# Altium PCB ENCBoard_rectangle.PcbDoc
Units mm, origin at the board's own origin, x right, y up, seen from the top; angles counter-clockwise.
Board outline 48 x 48 mm, 2 copper layers (Top Layer, Bottom Layer), stack 1.569 mm thick; 39 components, 33 nets, 226 pads, 78 vias.
Unrouted connection lines stored in the file: 19.
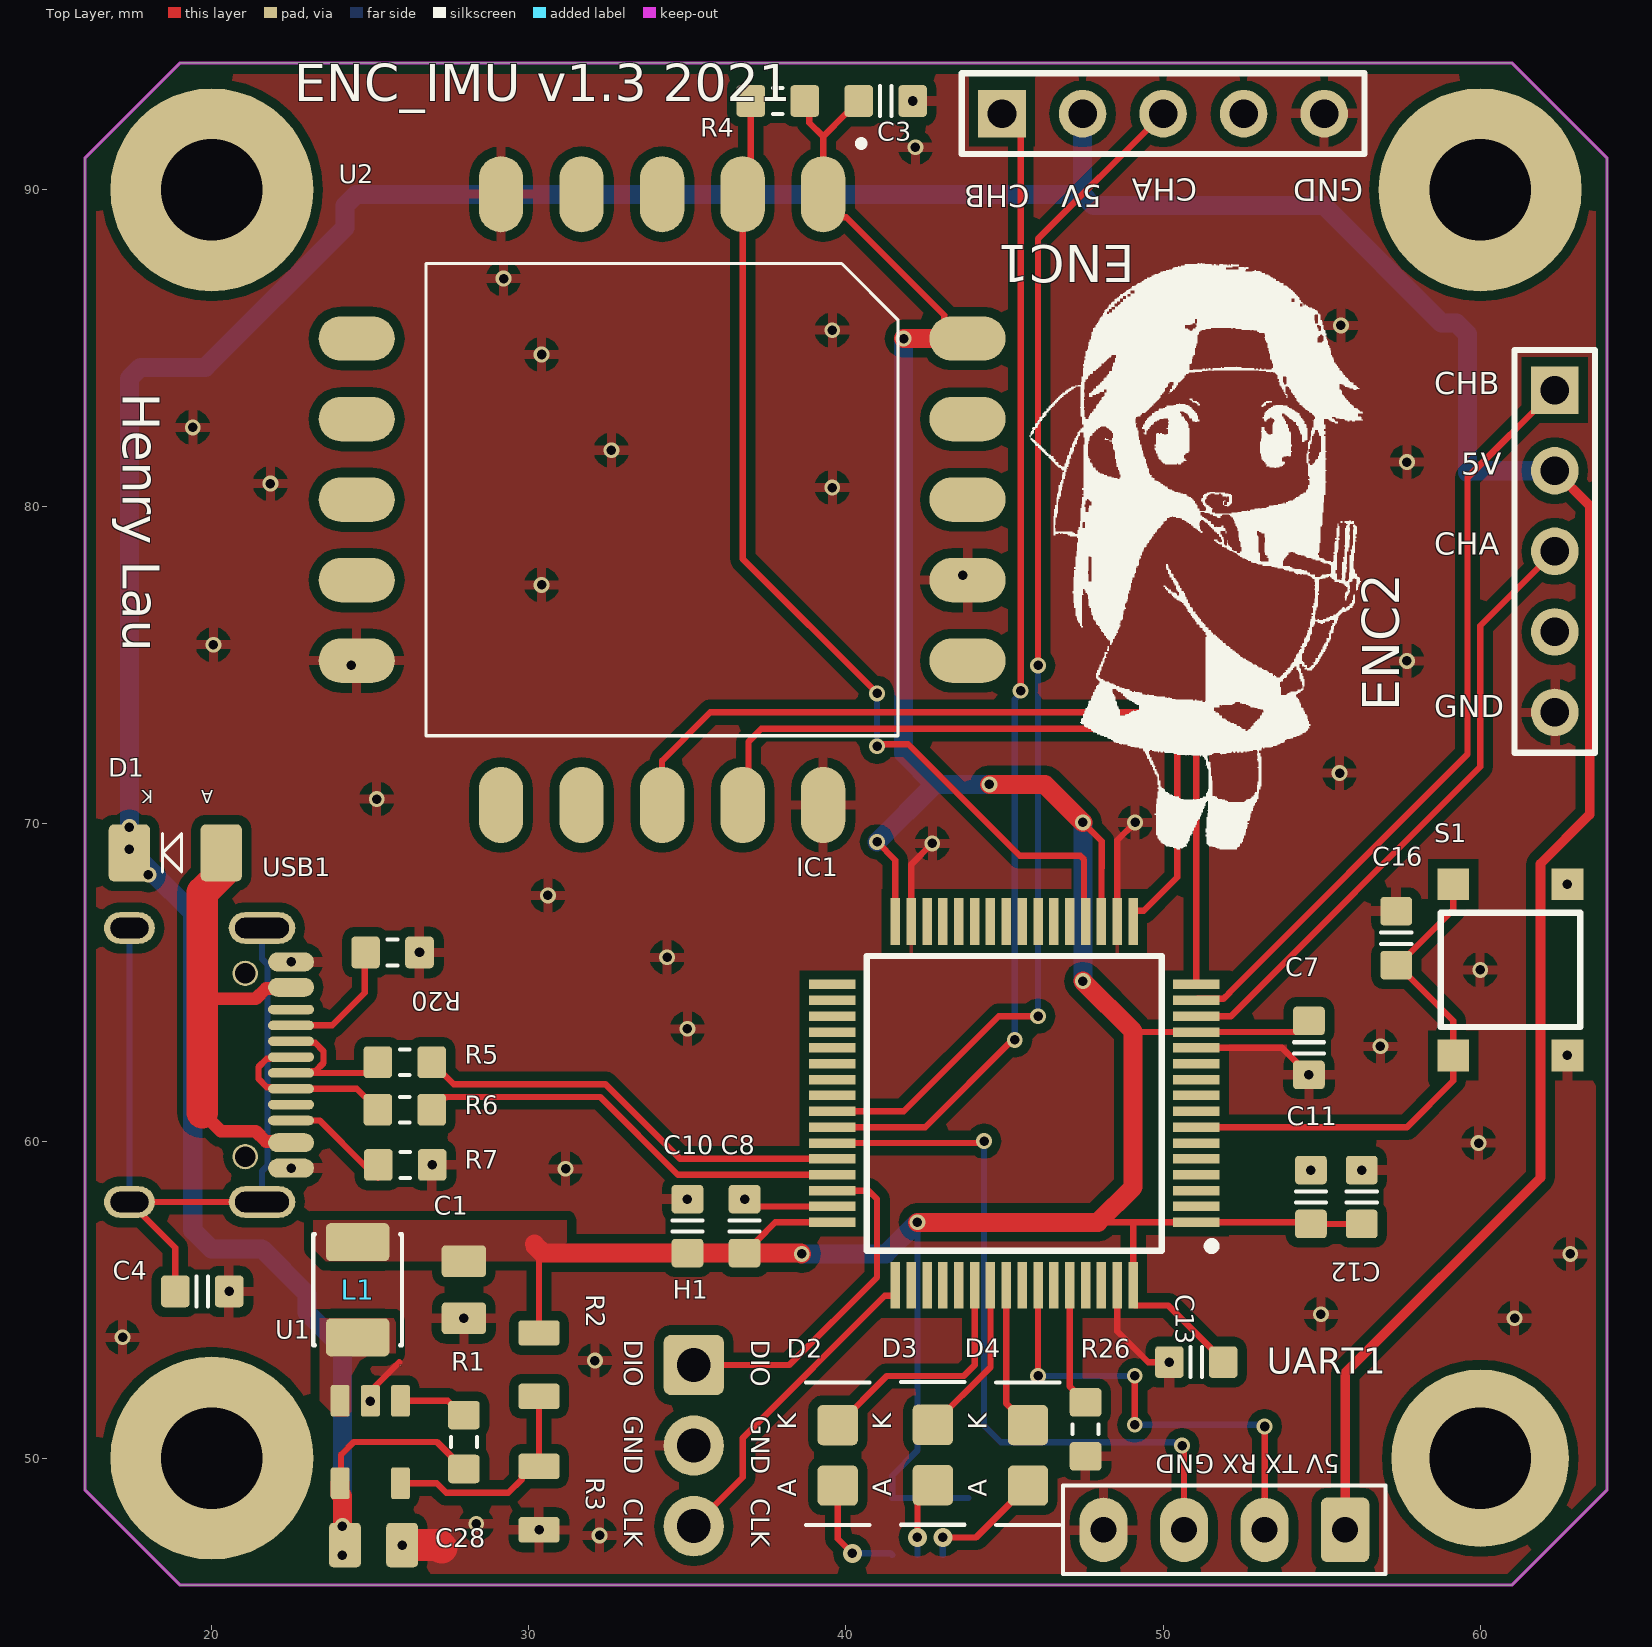
[diagram p0: Top Layer view]
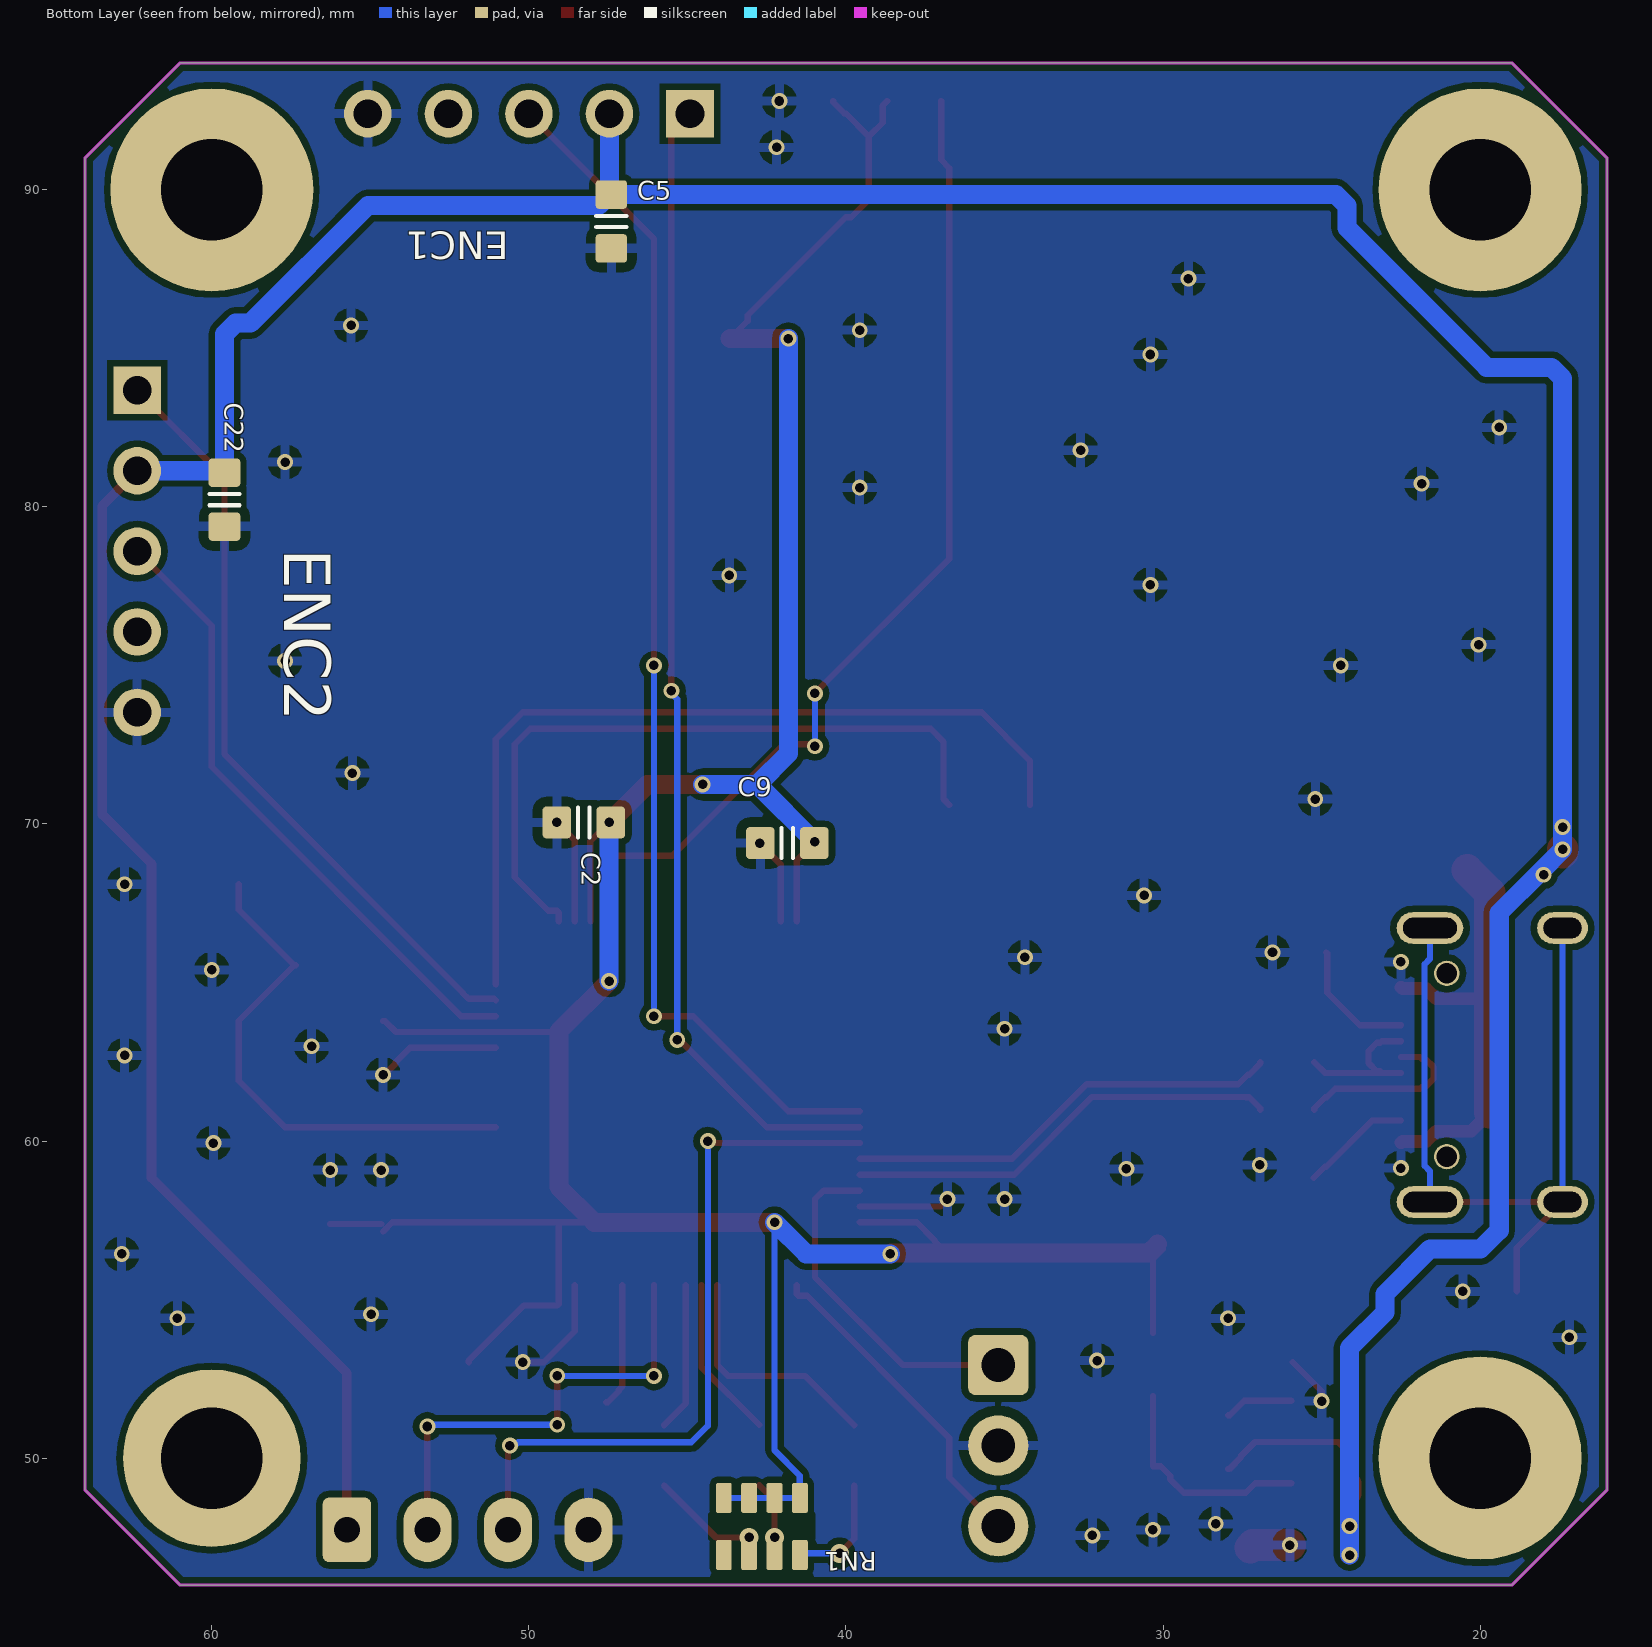
[diagram p1: Bottom Layer view, seen from below]
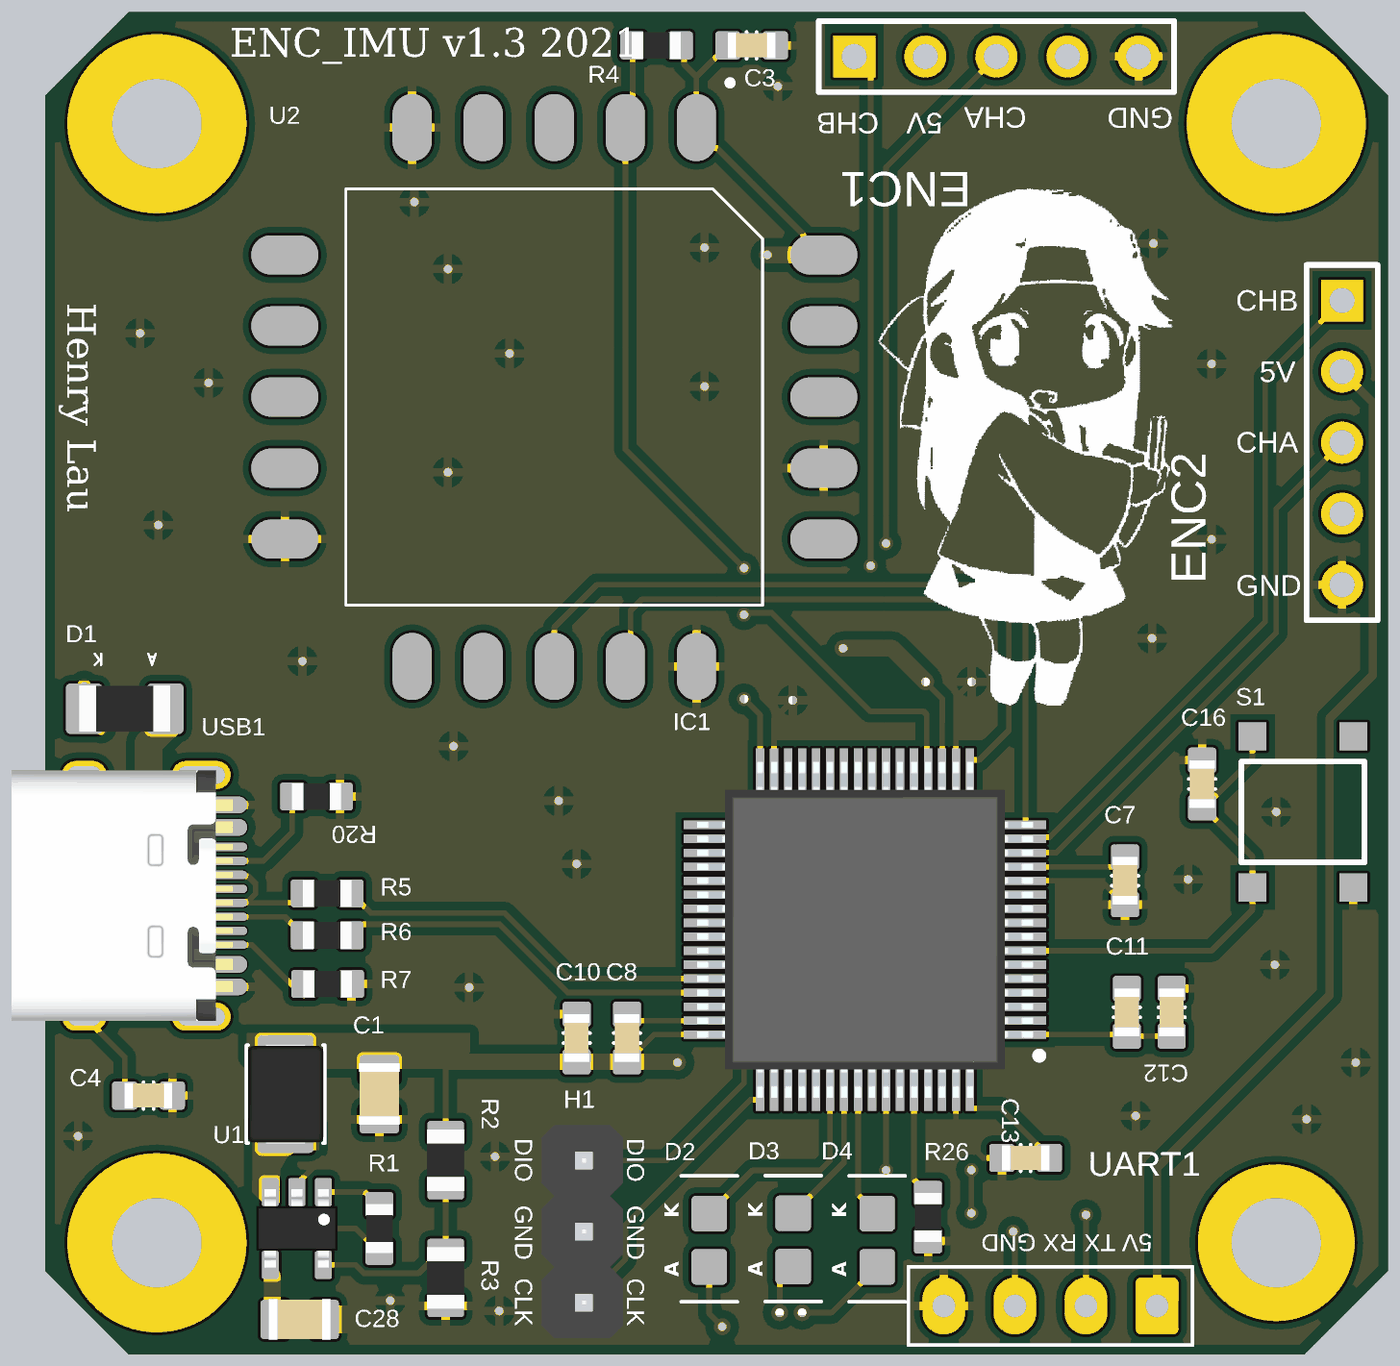
[diagram p2: 3D render of the assembled board from above, using the file's embedded part models]
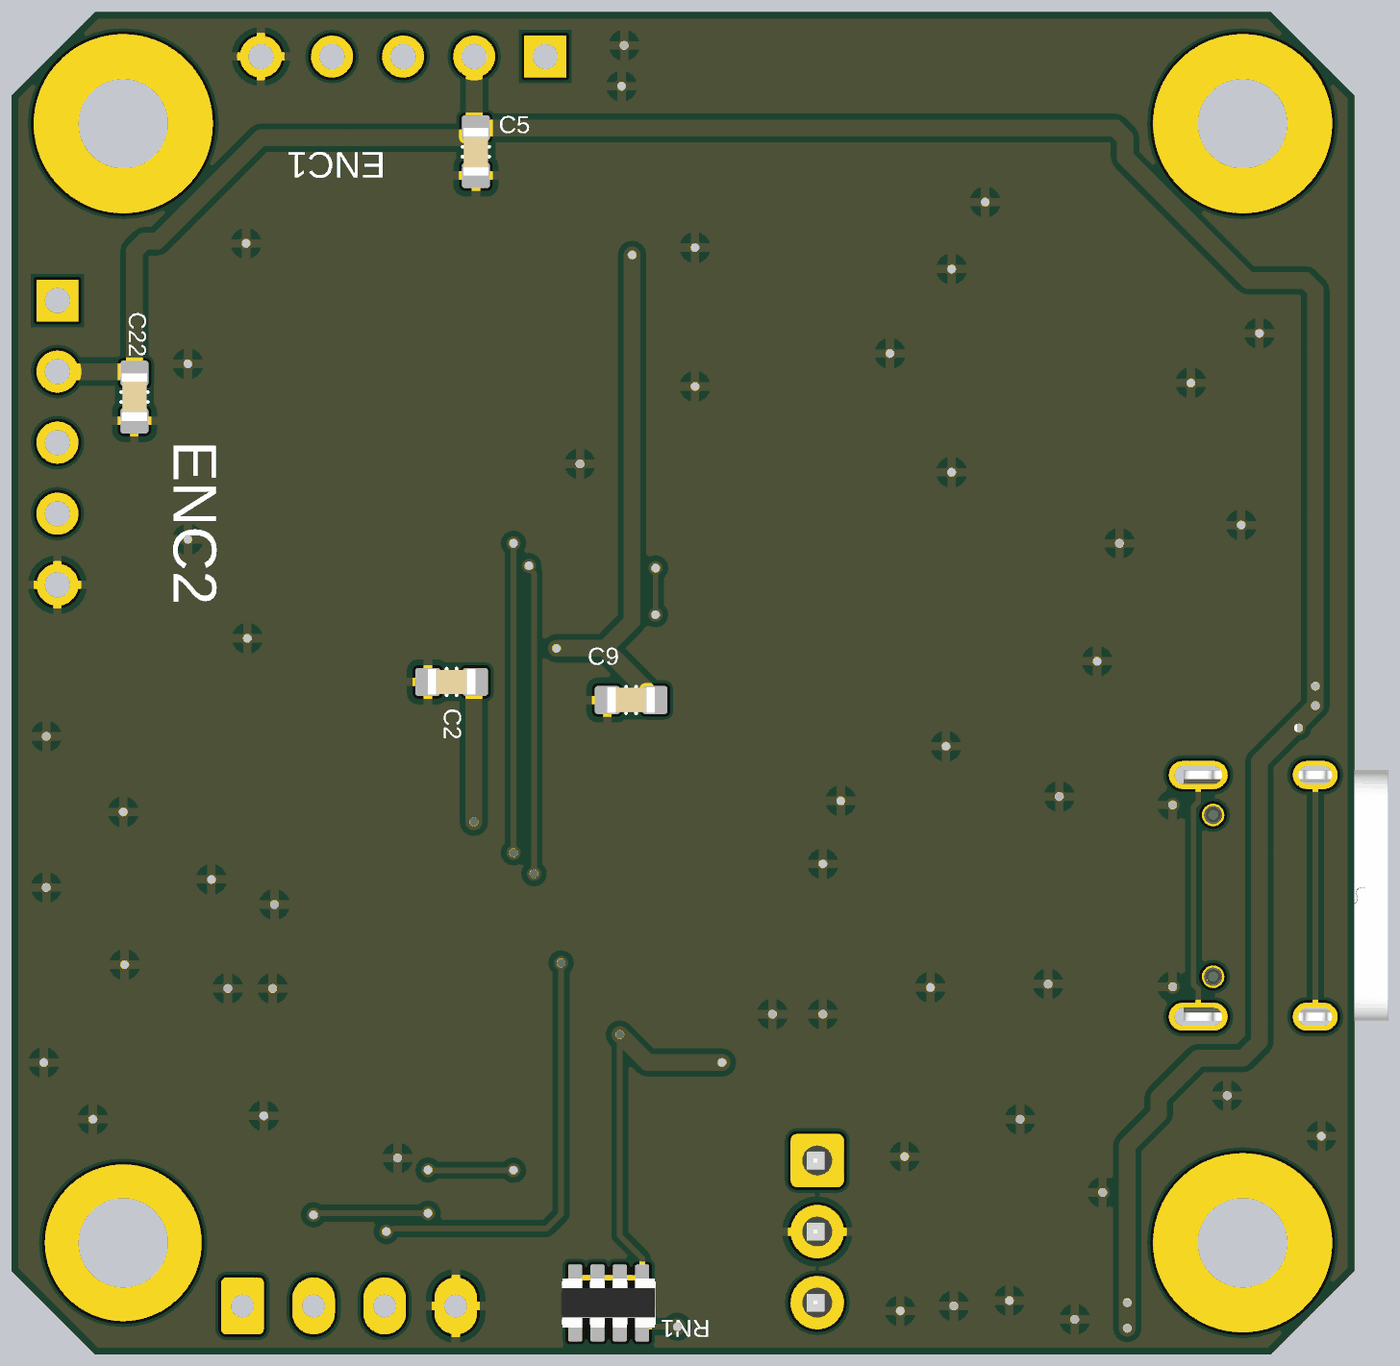
[diagram p3: 3D render of the assembled board from below, using the file's embedded part models]

## Layer stack, top to bottom
Top Solder: solder mask 0.0254, SM-001, Dk 4
Top Layer: signal copper 0.035
Dielectric 1: core 1.4986, Core-043, Dk 4.3
Bottom Layer: signal copper 0.035
Bottom Solder: solder mask 0.0254, SM-001, Dk 4

## Board outline
19,94 61,94 64,91 64,49 61,46 19,46 16,49 16,91

## Design rules (kind name [scope] priority, off if disabled: settings)
Clearance "GND plane" [OnLayer('Signal Layer 2', 'Signal Layer 1') OR InNamedPolygon('TOP_GND')] p1: gap=0.3 ignorepadtopadclearanceinfootprint=FALSE
Clearance [All] p2: gap=0.2 ignorepadtopadclearanceinfootprint=FALSE
HoleSize [All] p1: absolutevalues=TRUE maxlimit=100 minlimit=0.05 maxpercent=80.000 minpercent=20.000
MinimumSolderMaskSliver [All] p1: minsoldermaskwidth=0.09
PolygonConnect J1 [InComponent('J1')] p1: thpad.connectstyle=Direct thpad.reliefconductorwidth=0.254 thpad.reliefentries=4 thpad.polygonreliefangle="90 Angle" thpad.airgapwidth=0.254 smdpad.connectstyle=Relief smdpad.reliefconductorwidth=0.254 smdpad.reliefentries=4 smdpad.polygonreliefangle="90 Angle" smdpad.airgapwidth=0.254 via.connectstyle=Relief via.reliefconductorwidth=0.254 via.reliefentries=4 via.polygonreliefangle="90 Angle" via.airgapwidth=0.254
PolygonConnect "Ground Plane (signal)" [InNet('GND')] p2: connectstyle=Relief reliefconductorwidth=0.3 reliefentries=4 polygonreliefangle="90 Angle" airgapwidth=0.3
PolygonConnect [All] p3: connectstyle=Direct reliefconductorwidth=0.254 reliefentries=4 polygonreliefangle="90 Angle" airgapwidth=0.254
RoutingVias [All] p1: holewidth=0.3 width=0.5 viastyle="Through Hole" minholewidth=0.3 minwidth=0.5 maxholewidth=6 maxwidth=6.3
SilkToSilkClearance [All] p1: silktosilkclearance=0.09
SilkToSolderMaskClearance [IsPad] p1: minsilkscreentomaskgap=0.09 clearancetoexposedcopper=TRUE
SolderMaskExpansion [All] p1: expansion=0.102 istentingtop=FALSE
Width [All] p1: maxlimit=10 minlimit=0.2 preferedwidth=0.2
26 further rules are at their usual default settings.

## Classes and differential pairs
component class U_IMU: C2 C3 R4 U2
component class U_STM32F401R: C4 C7 C8 C9 C10 C11 C12 C13 C16 D1 D2 D3 D4 H1 IC1 R5 R6 R7 R20 R26 RN1 S1 UART1 USB1
component class U_EncoderHeader: C5 C22 ENC1 ENC2
component class U_5V_to_3V3: C1 C28 L1 R1 R2 R3 U1

## Components (designator, comment, footprint, x,y, rotation, side; value= is the part's Value field where it differs from the comment)
C1 "Cap" CAPC2012X135N 27.95,55.313 r90 top value=10u
C2 "Cap" CAPC1608X90N 48.268,70.048 r180 bottom value=0.1u
C3 "Cap" CAPC1608X90N 41.25,92.8 r180 top value=0.1u
C4 "Cap" CAPC1608X90N 19.7,55.26 r180 top value=10p
C5 "Cap" CAPC1608X90N 47.4,89 r90 bottom value=1u
C7 "Cap" CAPC1608X90N 54.597,62.939 r90 top value=1u
C8 "Cap" CAPC1608X90N 36.8,57.32 r270 top value=1u
C9 "Cap" CAPC1608X90N 41.85,69.4 r180 bottom value=1u
C10 "Cap" CAPC1608X90N 35,57.32 r270 top value=1u
C11 "Cap" CAPC1608X90N 54.661,58.237 r270 top value=1u
C12 "Cap" CAPC1608X90N 56.264,58.237 r270 top value=1u
C13 "Cap" CAPC1608X90N 51.044,53.031 r0 top value=0.1u
C16 "Cap" CAPC1608X90N 57.351,66.4 r270 top value=0.1u
C22 "Cap" CAPC1608X90N 59.6,80.23 r90 bottom value=1u
C28 "Cap" CAPC2012X135N 25.101,47.261 r180 top value=10u
D1 "diode" DIODE_3216_70N 18.85,69.09 r180 top
D2 "LED_Green_GullWing" LED-0805-A 39.738,50.091 r90 top
D3 "LED_Green_GullWing" LED-0805-A 42.738,50.102 r90 top
D4 "LED_Green_GullWing" LED-0805-A 45.738,50.091 r90 top
ENC1 "Header 5" HDR1X5 44.92,92.4 r0 top (schematic designator P1)
ENC2 "Header 5" HDR1X5 62.351,83.68 r270 top (schematic designator P2)
H1 "ST-Link" ST-Link 35.2,52.94 r270 top
IC1 "STM32F072RBT7" QFP50P1200X1200X160-64N 45.306,61.189 r180 top
L1 "inductor" INDM3225X240N 24.6,55.313 r90 top value=2u2
R1 "Res1" RESC1608X55N 27.95,50.51 r90 top value=10K
R2 "Res1" RESC2012X70N 30.32,52.95 r90 top value=100K
R3 "Res1" RESC2012X70N 30.32,48.743 r270 top value=22K
R4 "Res1" RESC1608X55N 37.85,92.8 r0 top value=10K
R5 "Res1" RESC1608X55N 26.085,62.489 r0 top value=22R
R6 "Res1" RESC1608X55N 26.085,60.989 r0 top value=22R
R7 "Res1" RESC1608X55N 26.1,59.25 r180 top value=5K1
R20 "Res1" RESC1608X55N 25.7,65.95 r180 top value=5K1
R26 "Res1" RESC1608X55N 47.556,50.91 r90 top value=10K
RN1 "resistor network" RESCAXS50P160X320X70-8N 42.654,47.848 r270 bottom value=1K
S1 "SW_THT_PB_4.3mm" TACT_SWT-SMD-4.4 63.151,67.6 r270 top
U1 "TLV62569" SOT23-5 25,50.51 r270 top
U2 "LPMS-NAV2" LPMS-NAV2 39.28,89.46 r270 top
UART1 "Programmer" HDR1X4_2.54MMP 55.74,47.743 r180 top
USB1 "USB type C connector" TYPE-C-31-M-12 22.5,62.4 r270 top

## Footprints (in the part's own frame and the unit in brackets; to place one, negate y for a bottom-side part, rotate by r counter-clockwise, add the part's x,y. Pads: shape width x height; smd on the part's side, far side on the other; paste and mask are expansions set on the pad)
CAPC1608X90N [mm] "Chip Capacitor, Body 1.6x0.8mm, EIA 0603, IPC Medium Density"
  round 0.254 on Mech15: 0(0,0)
  rrect25% 0.9x1 smd: 1(-0.85,0) 2(0.85,0)
  Top Layer pour cut-out: -0.6,0.5 -0.4,0.7 0.4,0.7 0.6,0.5 0.6,-0.5 0.4,-0.7 -0.4,-0.7 -0.6,-0.5
  silkscreen extent -0.18,-0.48 0.18,0.48, body extent -0.85,-0.45 0.85,0.45, height 0.89
CAPC2012X135N [mm]
  round 0.254 on Mech15: 0(0,0)
  rrect25% 1x1.4 smd: 1(-0.9,0) 2(0.9,0)
  body extent -1.1,-0.72 1.1,0.73, height 1.34
DIODE_3216_70N [mm]
  round 0.508 on Mech15: 0(0,0)
  rrect25% 1.3x1.8 smd mask+0.102: A(-1.45,0)
  rrect25% 1.3x1.8 smd: K(1.45,0)
  silkscreen extent -0.2,-0.6 0.4,0.6, body extent -1.62,-0.82 1.63,0.83, height 0.69
HDR1X4_2.54MMP [mil] "Connector; Header; 4 Position 0.100\" pitch"
  rrect25% 60x80 hole 32: 1(0,0)
  oval 60x80 hole 32: 2(100,0) 3(200,0) 4(300,0)
  silkscreen extent -50,-55 350,55
HDR1X5 [mm] "Connector; Header; 5 Position"
  rect 1.5x1.5 hole 0.9: 1(0,0)
  round 1.5 hole 0.9: 2(2.54,0) 3(5.08,0) 4(7.62,0) 5(10.16,0)
  silkscreen extent -1.27,-1.27 11.43,1.27
INDM3225X240N [mm] "Molded Inductor, 2-Leads, Body 3.2x2.5mm, IPC Medium Density"
  round 0.508 on Mech15: 0(0,0)
  rrect25% 1.2x2 smd: 1(-1.5,0) 2(1.5,0)
  silkscreen extent -1.75,-1.4 1.75,1.4, body extent -1.79,-1.35 1.79,1.35, height 2.4
LED-0805-A [mil]
  round 20 on Mech15: 0(0,0)
  rrect25% 50x50 smd: A(-37.5,0) K(37.5,0)
  Top Layer pour cut-out: -15,30 15,30 15,-30 -15,-30
  silkscreen extent -87,-39 91,39, body extent -39,-25 39,25, height 31
LPMS-NAV2 [mm]
  oval 2.4x1.4 smd: 1(-0.4,0) 2(-0.4,-2.54) 3(-0.4,-5.08) 4(-0.4,-7.62) 5(-0.4,-10.16) 11(18.86,-10.16) 12(18.86,-7.62) 13(18.86,-5.08) 14(18.86,-2.54) 15(18.86,0)
  oval 1.4x2.4 smd: 6(4.15,-14.71) 7(6.69,-14.71) 8(9.23,-14.71) 9(11.77,-14.71) 10(14.31,-14.71) 16(14.31,4.55) 17(11.77,4.55) 18(9.23,4.55) 19(6.69,4.55) 20(4.15,4.55)
  silkscreen extent -2.1,-12.52 16.67,2.36, body extent -0.8,-15.2 19.52,5.12, height 3.7
QFP50P1200X1200X160-64N [mm]
  rect 1.475x0.3 smd: 1(-5.738,3.75) 2(-5.738,3.25) 3(-5.738,2.75) 4(-5.738,2.25) 5(-5.738,1.75) 6(-5.738,1.25) 7(-5.738,0.75) 8(-5.738,0.25) 9(-5.738,-0.25) 10(-5.738,-0.75) 11(-5.738,-1.25) 12(-5.738,-1.75) 13(-5.738,-2.25) 14(-5.738,-2.75) 15(-5.738,-3.25) 16(-5.738,-3.75) 33(5.738,-3.75) 34(5.738,-3.25) 35(5.738,-2.75) 36(5.738,-2.25) 37(5.738,-1.75) 38(5.738,-1.25) 39(5.738,-0.75) 40(5.738,-0.25) 41(5.738,0.25) 42(5.738,0.75) 43(5.738,1.25) 44(5.738,1.75) 45(5.738,2.25) 46(5.738,2.75) 47(5.738,3.25) 48(5.738,3.75)
  rect 0.3x1.475 smd: 17(-3.75,-5.738) 18(-3.25,-5.738) 19(-2.75,-5.738) 20(-2.25,-5.738) 21(-1.75,-5.738) 22(-1.25,-5.738) 23(-0.75,-5.738) 24(-0.25,-5.738) 25(0.25,-5.738) 26(0.75,-5.738) 27(1.25,-5.738) 28(1.75,-5.738) 29(2.25,-5.738) 30(2.75,-5.738) 31(3.25,-5.738) 32(3.75,-5.738) 49(3.75,5.738) 50(3.25,5.738) 51(2.75,5.738) 52(2.25,5.738) 53(1.75,5.738) 54(1.25,5.738) 55(0.75,5.738) 56(0.25,5.738) 57(-0.25,5.738) 58(-0.75,5.738) 59(-1.25,5.738) 60(-1.75,5.738) 61(-2.25,5.738) 62(-2.75,5.738) 63(-3.25,5.738) 64(-3.75,5.738)
  silkscreen extent -6.35,-4.65 4.65,4.65, body extent -6,-6 6,6, height 1.6
RESC1608X55N [mm] "Chip Resistor, Body 1.6x0.8mm, EIA 0603, IPC Medium Density"
  round 0.254 on Mech15: 0(0,0)
  rrect25% 0.9x1 smd: 1(-0.85,0) 2(0.85,0)
  Top Layer pour cut-out: -0.6,0.5 -0.4,0.7 0.4,0.7 0.6,0.5 0.6,-0.5 0.4,-0.7 -0.4,-0.7 -0.6,-0.5
  silkscreen extent -0.15,-0.41 0.15,0.41, body extent -0.87,-0.47 0.88,0.48, height 0.54
RESC2012X70N [mm]
  rrect25% 0.8x1.3 smd: 1(-1,0) 2(1,0)
  body extent -1.1,-0.67 1.1,0.68, height 0.69
RESCAXS50P160X320X70-8N [mm] "Resistor Pack, Body 1.6x3.2mm, 4x0603, IPC Medium Density"
  round 0.254 on Mech15: 0(0,0)
  rrect25% 0.95x0.5 smd: 1(-0.9,1.2) 2(-0.9,0.4) 3(-0.9,-0.4) 4(-0.9,-1.2) 5(0.9,-1.2) 6(0.9,-0.4) 7(0.9,0.4) 8(0.9,1.2)
  Top Layer pour cut-out: -0.4,1.7 0.4,1.7 0.4,-1.7 -0.4,-1.7
  body extent -0.87,-1.68 0.88,1.67, height 0.7
SOT23-5 [mm]
  rrect25% 1x0.6 smd: 1(-1.3,0.95) 2(-1.3,0) 3(-1.3,-0.95) 4(1.3,-0.95) 5(1.3,0.95)
  body extent -1.4,-1.45 1.4,1.45, height 1.44
ST-Link [mil] "Connector; Header; 3 Position"
  rrect25% 75x75 hole 42: 1(0,0)
  round 75 hole 42: 2(100,0) 3(200,0)
  body extent -50,-57 250,57, height 335
TACT_SWT-SMD-4.4 [mm]
  rect 1x1 smd mask+0.102: 1(-0.5,-4) 1(4.9,-4) 2(-0.5,-0.4) 2(4.9,-0.4)
  silkscreen extent 0.4,-4.4 4,0
TYPE-C-31-M-12 [mm] "type C connector"
  oval 0.6x1.45 smd mask+0.05: A1(-3.25,0) A4(-2.45,0) B1(3.25,0) B4(2.45,0)
  oval 0.3x1.45 smd mask+0.05: A5(-1.25,0) A6(-0.25,0) A7(0.25,0) A8(1.25,0) B5(1.75,0) B6(0.75,0) B7(-0.75,0) B8(-1.75,0)
  round 0.8 hole 0.65: NA(-2.89,-1.445) NA(2.89,-1.445)
  oval 1x2.1 hole 0.65 slot 1.7 at 90 deg: SH(-4.32,-0.915) SH(4.32,-0.915)
  oval 1x1.6 hole 0.65 slot 1.2 at 90 deg: SH(-4.32,-5.095) SH(4.32,-5.095)
  body extent -4.47,-7.7 4.48,0.2, height 3.23

## Part data
C1 C2 C3 C4 C5 C7 C8 C9 C10 C11 C12 C13 C16 C22 C28: "Capacitor", LatestRevisionDate=17-Jul-2002, LatestRevisionNote="Re-released for DXP Platform.", PackageDescription="Radial Cap, Thru-Hole; 2 Leads; 0.3 in Pin Spacing", PackageReference=RAD-0.3, Published=8-Jun-2000, Publisher="Altium Limited"
D1: library part SD1206S040S2R0, "40V 2A", ComponentLink1Description=mouser, ComponentLink1URL=https://www.mouser.hk/ProductDetail/AVX/SD1206S040S2R0?qs=jCA%252BPfw4LHbfEJl0sZ31oA%3D%3D
D2 D3 D4: "LED Gull-wing SMD High-intensity Green 450mcd 574nm", Color=Green, Manufacturer 1=Ligitek, Manufacturer Part Number 1=L8UG9033/TR1, Package / Case="4.6mm Gull-Wing", Ratings="450 mcd; 574 nm", Material=AlGaInP, SCDType=source
ENC1 ENC2: "Header, 5-Pin", LatestRevisionDate=17-Jul-2002, LatestRevisionNote="Re-released for DXP Platform.", Publisher="Altium Limited"
H1: "ST-Link header with silkscreen"
IC1: "Integrated Circuit", Manufacturer_Name=STMicroelectronics, Mouser Part Number=511-STM32F072RBT7, Arrow Part Number=STM32F072RBT7, Arrow Price/Stock=https://www.arrow.com/en/products/stm32f072rbt7/stmicroelectronics, Datasheet Link=https://componentsearchengine.com/Datasheets/1/STM32F072RBT7.pdf, Height=1.6mm, Manufacturer_Part_Number=STM32F072RBT7, Mouser Price/Stock=https://www.mouser.co.uk/ProductDetail/STMicroelectronics/STM32F072RBT7?qs=U58vgkJzipSwHgVHrxMqQQ%3D%3D
L1: library part INDC, "IHLP SMD 4040", link=http://www.mouser.hk/ProductDetail/Panasonic/ETQ-P5M4R7YFC/?qs=sGAEpiMZZMsg%252by3WlYCkUx1BJssUTVH58rrEHsPkNus%3d
R1 R2 R3 R4 R5 R6 R7 R20 R26: "Resistor", LatestRevisionDate=17-Jul-2002, LatestRevisionNote="Re-released for DXP Platform.", PackageDescription="Axial Device, Thru-Hole; 2 Leads; 0.3 in Pin Spacing", PackageReference=AXIAL-0.3, Published=8-Jun-2000, Publisher="Altium Limited"
RN1: library part RES_NET
S1: "Switch, tact, 4.3mm stem", Manufacturer 1=Bond-Tact, Manufacturer Part Number 1=TS-1143-WP-300, Package / Case="6.5x6.5mm; 4.3mm stem", Function=Speed, Material="Brass/Nylon/Ag plating", SCDType=spec
U1: "2-A High Efficiency Synchronous Buck Converter in SOT Package", Manufacturer=TI, Iout(max)=2A, Vin=2.5-5.5V
UART1: library part Header4P, "Header 4-pin"
USB1: library part USB_Type_C, ComponentLink1Description=Datasheet, ComponentLink1URL=https://lcsc.com/product-detail/USB-Type-C_Korean-Hroparts-Elec-TYPE-C-31-M-12_C165948.html
U2: ComponentLink1Description=datasheet, ComponentLink1URL=https://www.lp-research.com/wp-content/uploads/2017/11/LPMS-NAV2Manual20171025.pdf, ComponentLink2Description="official website", ComponentLink2URL=https://lp-research.com/lpms-nav2/

## Free pads (board coordinates)
  round 5.6 hole 3.2: 3(60,50)
  round 6.4 hole 3.2: 10(20,50) 11(20,90) 12(60,90)

## Via types
v1: diameter 0.5, hole 0.3, Top Layer to Bottom Layer, tented both sides, 75 vias
v2: diameter 0.6, hole 0.3, Top Layer to Bottom Layer, tented both sides, 3 vias

## Nets (pads, with @x,y where several pads share a name; then routed paths per layer and width w, separated by ;. In a path a pad name is that pad's centre, name@x,y a point inside that pad or via, vN(x,y) a via of type N, cw(c..) or ccw(c..) an arc to the next point about the centre after c; other vN are vias at no path point)
3V3: C1.2 C2.2 C3.2 C7.2 C8.2 C9.2 C10.2 C11.2 C12.2 C13.2 IC1.1 IC1.13 IC1.19 IC1.32 IC1.48 IC1.64 L1.2 R2.2 R4.2 RN1.1 RN1.2 RN1.3 RN1.4 U2.1 U2.20 | length 111.3
  Top Layer w0.2: 30.015,56.598 30.32,56.293 R2.2 ; C8.2@36.843,56.47 37.192,56.819 37.192,56.863 37.769,57.439 IC1.48 ; R4.2 38.843,92.657 38.843,92.117 39.28,91.68 ; C3.2 40.4,92.757 40.051,92.408 40.008,92.408 39.28,91.68 ; v1(40.98,69.437) 41.556,68.861 IC1.32 ; U2.20 43.655,85.31 43.1,85.864 43.1,86.04 40.01,89.13 39.834,89.13 39.28,89.685 U2.1 39.28,91.68 ; v1(47.472,70.048) 48.068,69.453 48.068,68.616 48.056,68.604 IC1.19 ; 47.945,57.439 49.056,57.439 ; 49.056,63.462 49.078,63.439 IC1.13 54.191,63.439 54.541,63.789 C7.2 ; C13.2 51.894,53.081 50.16,54.814 49.106,54.814 49.056,54.864 IC1.64 49.056,57.439 ; C11.2@54.597,57.151 54.309,57.439 IC1.1 49.056,57.439 ; C11.2 C12.2
  Top Layer w0.6: 30.17,56.753 30.452,56.47 C10.2 C8.2 36.843,56.47 38.575,56.47 v1(38.604,56.442) ; v1(41.817,85.31) U2.20@43.655,85.31 ; v1(42.254,57.439) 47.945,57.439 49.056,58.55 49.056,63.462 v1(47.472,65.046) ; v1(44.52,71.247) 46.273,71.247 v1(47.472,70.048)
  Bottom Layer w0.2: v1(42.254,57.439) 42.254,50.25 41.454,49.45 RN1.1 RN1.2 RN1.3 RN1.4
  Bottom Layer w0.6: v1(38.604,56.442) 41.256,56.442 v1(42.254,57.439) ; v1(40.98,69.437) 42.79,71.247 ; v1(41.817,85.31) 41.817,72.22 42.79,71.247 ; v1(44.52,71.247) 42.79,71.247 ; v1(47.472,65.046) v1(47.472,70.048)
5V: C5.2 C22.2 C28.2 D1.K ENC1.2 ENC2.2 R1.1 U1.4 UART1.1 | length 142.2
  Top Layer w0.2: U1.4 24.077,49.237 24.077,50.11 24.477,50.51 27.1,50.51 27.558,50.053 27.558,50.009 27.907,49.66 R1.1
  Top Layer w0.3: UART1.1 55.74,52.684 61.901,58.845 61.901,68.745 63.451,70.295 63.451,80.04 ENC2.2
  Top Layer w0.6: U1.4 24.05,48.878 24.121,48.808 v1(24.121,46.948)
  Top Layer w1: D1.K v1(17.4,69.2)
  Bottom Layer w0.6: v1(24.121,46.948) v1(24.121,47.86) 24.121,53.479 23,54.6 23,55.185 21.585,56.6 19.986,56.6 19.4,57.186 19.4,67.2 18.1,68.5 v1(17.4,69.2) v1(17.4,69.9) 17.4,84.049 17.751,84.4 19.8,84.4 24.2,88.8 24.2,89.499 24.551,89.85 C5.2 ; ENC1.2 47.46,89.91 C5.2 ; ENC2.2 59.66,81.14 C22.2 59.6,85.449 59.249,85.8 58.78,85.8 55.08,89.5 47.8,89.5 47.45,89.85 C5.2
  other v1: 18,68.4
BOOT0: IC1.60 R26.2 | length 3.9
  Top Layer w0.2: IC1.60 47.056,52.26 47.164,52.152 47.164,52.109 47.513,51.76 R26.2
ENC1_CHA: ENC1.3 IC1.41 | length 37.8
  Top Layer w0.2: IC1.41 41.817,60.939 44.817,63.939 v1(46.056,63.939) ; v1(46.056,75) 46.056,88.456 ENC1.3
  Bottom Layer w0.2: v1(46.056,63.939) v1(46.056,75)
ENC1_CHB: ENC1.1 IC1.42 | length 36.4
  Top Layer w0.2: IC1.42 42.495,60.439 45.245,63.189 v1(45.323,63.189) ; ENC1.1 45.506,91.814 v1(45.506,74.2)
  Bottom Layer w0.2: v1(45.323,63.189) 45.323,73.936 45.506,74.119 v1(45.506,74.2)
ENC2_CHA: ENC2.3 IC1.14 | length 20
  Top Layer w0.2: IC1.14 52.139,63.939 60,71.8 60,76.249 ENC2.3
ENC2_CHB: ENC2.1 IC1.15 | length 24.4
  Top Layer w0.2: IC1.15 51.094,64.489 51.906,64.489 52.081,64.665 52.081,64.681 59.6,72.2 59.6,80.929 ENC2.1
GND: C1.1 C2.1 C3.1 C4.1 C5.1 C7.1 C8.1 C9.1 C10.1 C11.1 C12.1 C13.1 C16.1 C22.1 C28.1 ENC1.5 ENC2.5 H1.2 IC1.12 IC1.18 IC1.31 IC1.47 IC1.63 R3.2 R7.1 R20.1 R26.1 S1.2 U1.2 U2.5 U2.10 U2.15 U2.17 UART1.4 USB1.A1 USB1.B1 | length 19.3
  Top Layer w0.2: v1(25,51.8) 25,52.108 25.917,53.025 ; v1(36.8,58.17) 37.031,57.939 IC1.47 ; IC1.31 42.056,68.724 v1(42.721,69.39) ; IC1.63 48.556,54.007 49.532,53.031 v1(50.194,53.031) ; IC1.18 48.556,69.487 v1(49.118,70.048) ; IC1.12 53.747,62.939 54.205,62.482 54.205,62.438 54.554,62.089 v1(54.597,62.089)
  Top Layer w1: v1(26.001,47.261) 27.162,47.261 27.25,47.173
  other v1: 32.231,47.565 30.32,47.743 28.338,47.933 32.081,53.081 17.185,53.813 27.95,54.413 61.085,54.414 54.977,54.539 20.55,55.26 62.84,56.442 35,58.17 54.661,59.087 56.264,59.087 31.157,59.127 22.5,59.15 26.95,59.25 59.951,59.939 62.751,62.7 56.851,62.989 35,63.543 60,65.4 22.5,65.65 34.358,65.797 26.55,65.95 30.6,67.746 62.751,68.1 25.2,70.787 55.564,71.604 24.4,75 57.69,75.143 20.051,75.654 30.4,77.54 43.68,77.84 39.568,80.61 21.848,80.734 57.69,81.414 32.6,81.786 19.4,82.509 30.4,84.806 39.568,85.571 55.61,85.721 29.2,87.2 42.191,91.341 42.1,92.8
LED1: D2.K IC1.54 | length 7.6
  Top Layer w0.2: D2.K 41.288,52.593 43.711,52.593 44.056,52.938 IC1.54
LED2: D3.K IC1.55 | length 5.2
  Top Layer w0.2: D3.K 44.556,52.872 IC1.55
LED3: D4.K IC1.56 | length 4.7
  Top Layer w0.2: IC1.56 45.056,51.726 D4.K
N\R\S\T\: IC1.20 R4.1 U2.2 | length 32.2
  Top Layer w0.2: R4.1 37,90.945 36.74,90.685 U2.2 36.74,78.359 v1(40.98,74.119) ; v1(40.98,72.45) 41.061,72.45 41.128,72.517 41.967,72.517 45.483,69 47.389,69 47.506,68.883 47.506,66.977 IC1.20
  Bottom Layer w0.2: v1(40.98,72.45) v1(40.98,74.119)
NetC4_2: C4.2 USB1.SH | length 25
  Top Layer w0.2: USB1.SH@17.405,58.08 USB1.SH@17.488,58.08 ; C4.2 18.85,56.635 17.858,57.627 17.858,57.71 USB1.SH@17.488,58.08 ; USB1.SH@21.585,58.08 USB1.SH@17.488,58.08
  Bottom Layer w0.2: USB1.SH@17.405,58.08 USB1.SH@17.405,66.72 ; USB1.SH@21.585,58.08 21.585,59.05 21.755,59.22 21.755,65.58 21.585,65.75 USB1.SH@21.585,66.72
NetD1_A: D1.A USB1.A4 USB1.B4 | length 14.3
  Top Layer w0.4: 19.7,60.9 20.29,60.31 21.386,60.31 21.708,59.988 22.461,59.988 USB1.B4 ; 19.7,64.9 20.11,64.49 21.386,64.49 21.708,64.812 22.461,64.812 USB1.A4
  Top Layer w1: 19.7,60.9 19.7,64.49 19.7,64.9 19.7,67.837 D1.A@20.409,68.546
NetD2_A: D2.A RN1.8 | length 3.6
  Top Layer w0.2: D2.A 39.738,47.462 v2(40.2,47)
  Bottom Layer w0.2: v2(40.2,47) 41.402,47 RN1.8
NetD3_A: D3.A RN1.7 | length 2.4
  Top Layer w0.2: v2(42.254,47.5) 42.254,48.665 D3.A
  Bottom Layer w0.2: RN1.7 v2(42.254,47.5)
NetD4_A: D4.A RN1.6 | length 3.9
  Top Layer w0.2: v2(43.054,47.5) 44.099,47.5 D4.A
  Bottom Layer w0.2: RN1.6 v2(43.054,47.5)
NetL1_1: L1.1 U1.3
NetR1_2: R1.2 U1.1 | length 2.2
  Top Layer w0.2: U1.1 27.443,51.81 27.893,51.36 R1.2
NetR2_1: R2.1 R3.1 U1.5 | length 7.1
  Top Layer w0.2: U1.5 27.092,49.21 27.392,48.91 29.353,48.91 29.77,49.327 29.77,49.443 30.07,49.743 R3.1 R2.1
NetR5_1: R5.1 USB1.A7 USB1.B7 | length 5
  Top Layer w0.2: USB1.A7 USB1.A7@23.102,62.15 ; USB1.B7 23.102,63.15 23.152,63.1 23.261,63.1 23.525,62.836 23.525,62.464 23.261,62.2 23.152,62.2 USB1.A7@23.102,62.15 ; R5.1 24.895,62.15 USB1.A7@23.102,62.15
NetR6_1: R6.1 USB1.A6 USB1.B6 | length 5.7
  Top Layer w0.2: USB1.A6 21.898,62.65 21.848,62.6 21.738,62.6 21.475,62.336 21.475,61.964 21.738,61.7 21.848,61.7 21.898,61.65 USB1.B6 24.574,61.65 24.842,61.382 24.886,61.382 25.235,61.033 R6.1
NetR7_2: R7.2 USB1.B5 | length 3.5
  Top Layer w0.2: USB1.B5 23.4,60.65 24.858,59.192 24.901,59.192 R7.2@25.25,58.843
NetR20_2: R20.2 USB1.A5 | length 4
  Top Layer w0.2: USB1.A5 23.799,63.65 24.828,64.679 24.828,65.928 R20.2
NRST: C16.2 IC1.7 S1.1 | length 16.4
  Top Layer w0.2: IC1.7 57.69,60.439 59.151,61.9 59.151,63.8 C16.2@57.401,65.55 ; C16.2 C16.2@57.394,65.55 ; S1.1@59.151,68.1 59.151,67.3 C16.2@57.401,65.55 ; C16.2@57.394,65.55 C16.2@57.401,65.55 ; C16.2@57.394,65.55 C16.2@57.401,65.55
SWCLK: H1.3 IC1.49 | length 10.4
  Top Layer w0.2: H1.3 36.74,49.4 36.74,50.636 41.223,55.119 41.506,55.119 41.556,55.169 IC1.49
SWDIO: H1.1 IC1.46 | length 10.9
  Top Layer w0.2: H1.1 38.213,52.94 40.98,55.707 40.98,58.17 40.711,58.439 IC1.46
UART1_RX: IC1.43 UART1.3 | length 23
  Top Layer w0.2: IC1.43 44.212,59.939 44.273,60 v1(44.354,60) ; v1(50.6,50.4) 50.66,50.34 UART1.3
  Bottom Layer w0.2: v1(44.354,60) 44.354,51.027 44.877,50.504 50.333,50.504 50.38,50.457 50.543,50.457 v1(50.6,50.4)
UART1_TX: IC1.58 UART1.2 | length 14.8
  Top Layer w0.2: v1(46.056,52.593) IC1.58 ; v1(49.106,51.054) v1(49.106,52.6) ; UART1.2 v1(53.2,51)
  Bottom Layer w0.2: v1(46.056,52.593) 49.099,52.593 v1(49.106,52.6) ; v1(49.106,51.054) 53.146,51.054 v1(53.2,51)
UART2_RX: IC1.17 U2.14 | length 22.3
  Top Layer w0.2: U2.14 36.927,70.787 36.927,72.597 37.33,73 49.96,73 50.444,72.517 50.444,68.315 49.389,67.26 49.106,67.26 49.056,67.21 IC1.17
UART2_TX: IC1.16 U2.13 | length 27
  Top Layer w0.2: U2.13 34.2,72 35.72,73.52 50.194,73.52 51.044,72.67 IC1.16
USB_DN: IC1.44 R5.2 | length 13.9
  Top Layer w0.2: R5.2 26.935,62.446 27.284,62.097 27.327,62.097 27.635,61.789 32.416,61.789 34.766,59.439 IC1.44
USB_DP: IC1.45 R6.2 | length 13.8
  Top Layer w0.2: R6.2 26.935,61.033 27.284,61.382 27.394,61.382 27.402,61.389 32.25,61.389 34.7,58.939 IC1.45
pads on no net: C1.0 C2.0 C3.0 C4.0 C5.0 C7.0 C8.0 C9.0 C10.0 C11.0 C12.0 C13.0 C16.0 C22.0 C28.0 D1.0 D2.0 D3.0 D4.0 ENC1.4 ENC2.4 IC1.2 IC1.3 IC1.4 IC1.5 IC1.6 IC1.8 IC1.9 IC1.10 IC1.11 IC1.21 IC1.22 IC1.23 IC1.24 IC1.25 IC1.26 IC1.27 IC1.28 IC1.29 IC1.30 IC1.33 IC1.34 IC1.35 IC1.36 IC1.37 IC1.38 IC1.39 IC1.40 IC1.50 IC1.51 IC1.52 IC1.53 IC1.57 IC1.59 IC1.61 IC1.62 L1.0 R1.0 R4.0 R5.0 R6.0 R7.0 R20.0 R26.0 RN1.0 RN1.5 U2.3 U2.4 U2.6 U2.7 U2.8 U2.9 U2.11 U2.12 U2.16 U2.18 U2.19 USB1.A8 USB1.B8 USB1.NA

## Polygon pours and split planes (outlines as drawn)
GND on Top Layer "TOP_GND" (solid, pour order 34): 16,49 16,91 19,94 61,94 64,91 64,49 61,46 19,46
NetL1_1 on Top Layer "NETL1_1_L01_P018" (solid, pour order 18): 24.4,52.31 24.402,52.593 24.672,53.081 25.057,53.307 25.8,53.307 25.8,54.31 25.8,54.413 23.41,54.413 23.403,51.811 23.904,51.31 24.251,51.31 24.4,51.46
3V3 on Top Layer "3V3_L01_P016" (solid, pour order 16): 31.199,56.812 30.6,56.213 23.6,56.213 23.2,56.613 23.2,57.502 31.199,57.502
GND on Bottom Layer "BOT_GND" (solid, pour order 28): 61,94 19,94 16,91 16,49 19,46 61,46 64,49 64,91

## Keep-outs
Keep-Out Layer:
  lines w0.1: 19,46 16,49 16,91 19,94 61,94 64,91 64,49 ; 19,46 19,46 ; 19,46 61,46 64,49 ; 64,49 64,49

## Silkscreen, mask and mechanical layers (free items; w line width, h text height)
Top Overlay:
  drawing of 7 lines, arcs and shapes, not listed
  text "ENC_IMU v1.3 2021" at 22.6,92.4 h2
  text "CHA" at 51.075,90.587 h1.2 r180
  text "GND" at 56.309,90.573 h1.2 r180
  text "CHB" at 45.8,90.387 h1.2 r180
  text "5V" at 48.071,90.382 h1.2 r180
  text "Henry Lau" at 16.8,83.6 h2 r270
  text "CHB" at 58.556,83.317 h1.2
  text "5V" at 59.4,80.771 h1.2
  text "CHA" at 58.556,78.249 h1.2
  text "GND" at 58.556,73.133 h1.2
  text "5V TX RX GND" at 55.564,50.31 h1 r180
Bottom Overlay:
  text "ENC1" at 50.628,88.983 h1.5 r180
  text "ENC2" at 58.2,78.674 h2.5 r90

## Text inside footprints (layer, text, board x,y; h text height)
D1: Top Overlay "K" at 18.156,71.059 h0.4 r180; Top Overlay "A" at 20.051,71.059 h0.4 r180
D2: Top Overlay "K" at 38.638,50.891 h1 r90; Top Overlay "A" at 38.638,48.791 h1 r90
D3: Top Overlay "K" at 41.638,50.902 h1 r90; Top Overlay "A" at 41.638,48.802 h1 r90
D4: Top Overlay "A" at 44.638,48.791 h1 r90; Top Overlay "K" at 44.638,50.891 h1 r90
H1: Top Overlay "CLK" at 36.8,48.74 h1 r270; Top Overlay "DIO" at 36.8,53.74 h1 r270; Top Overlay "GND" at 36.8,51.34 h1 r270; Top Overlay "GND" at 32.8,51.34 h1 r270; Top Overlay "DIO" at 32.8,53.74 h1 r270; Top Overlay "CLK" at 32.8,48.74 h1 r270